# Altium PCB PCB1.PcbDoc
Units mm, origin at the board's own origin, x right, y up, seen from the top; angles counter-clockwise.
Board outline 240 x 132 mm, 2 copper layers (Top Layer, Bottom Layer); 44 components, 152 nets, 326 pads, 18 vias.
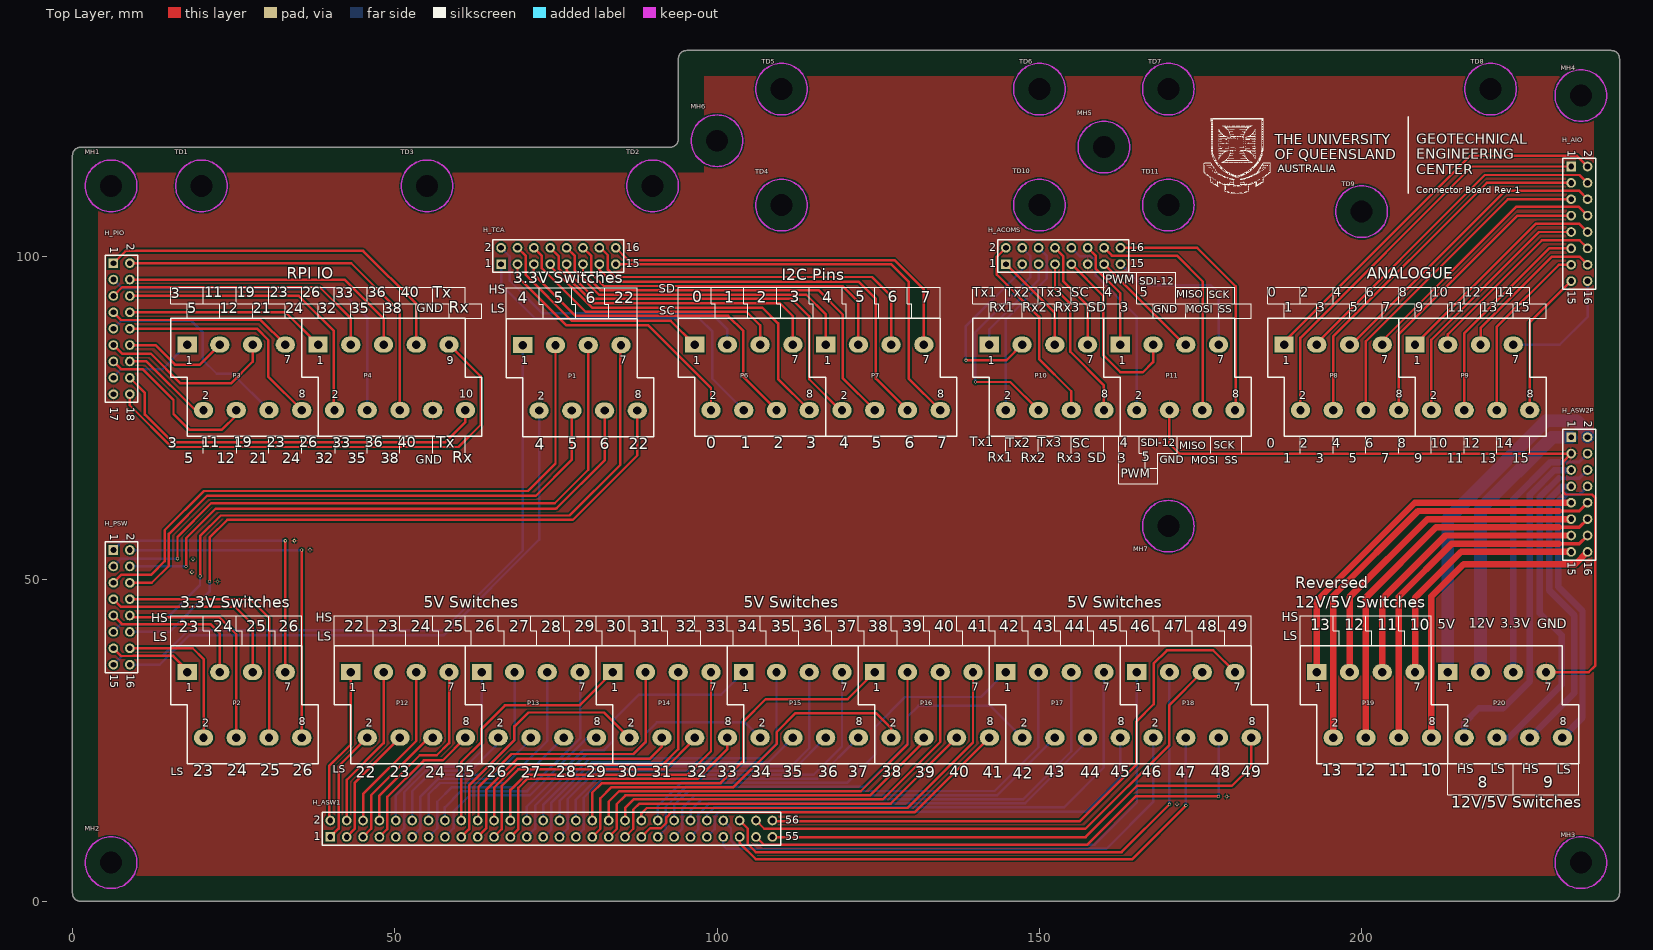
[diagram p0: Top Layer view]
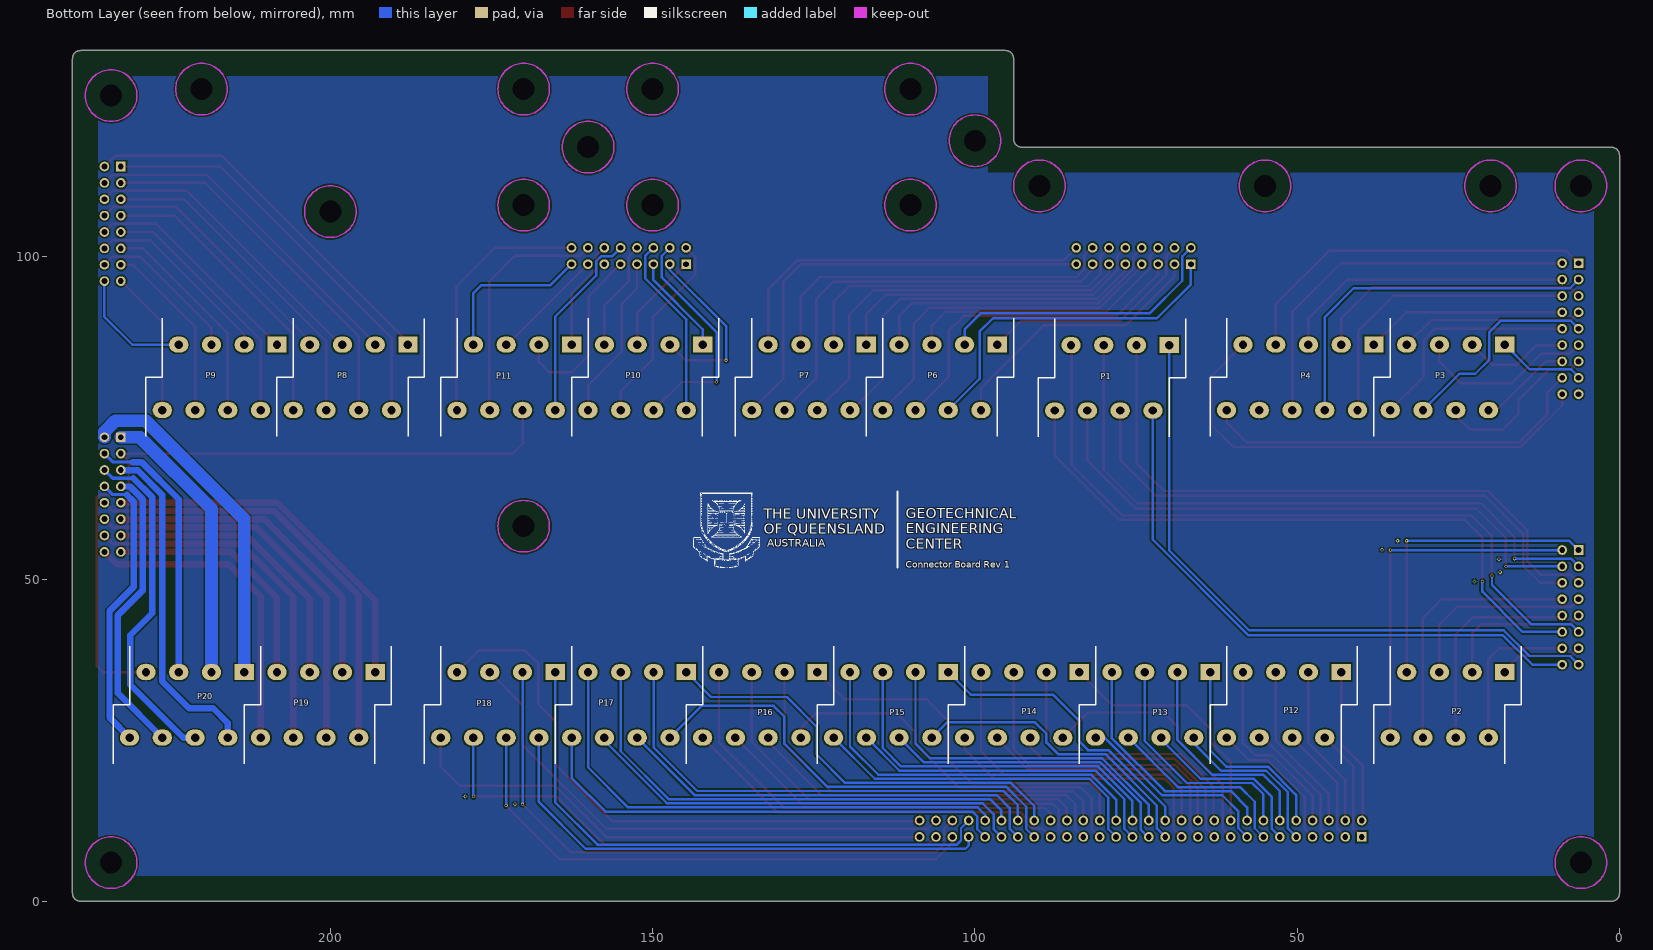
[diagram p1: Bottom Layer view, seen from below]

## Layer stack, top to bottom
Top Solder: solder mask 0.0102, Solder Resist, Dk 3.5
Top Layer: signal copper 0.0356
Dielectric 1: dielectric 0.32, FR-4, Dk 4.8
Bottom Layer: signal copper 0.0356
Bottom Solder: solder mask 0.0102, Solder Resist, Dk 3.5

## Board outline
0,1.27 0,115.73 cw(c1.27,115.73) 1.27,117 92.73,117 ccw(c92.73,118.27) 94,118.27 94,130.73 cw(c95.27,130.73) 95.27,132 238.73,132 cw(c238.73,130.73) 240,130.73 240,1.27 cw(c238.73,1.27) 238.73,0 1.27,0 cw(c1.27,1.27)

## Design rules (kind name [scope] priority, off if disabled: settings)
Clearance [All] p1: gap=0.254 ignorepadtopadclearanceinfootprint=TRUE except(0: Arc-Hole Track-Hole SMDPad-Hole THPad-Hole Via-Hole Fill-Hole Poly-Hole Region-Hole Text-Hole)
HoleSize [All] p1: absolutevalues=TRUE maxlimit=6.3 minlimit=0.3 maxpercent=80.000 minpercent=20.000
PlaneConnect [All] p1: planeconnectstyle=Relief reliefexpansion=0.508 reliefentries=4 reliefconductorwidth=0.3 reliefairgap=0.254
PolygonConnect [All] p1: connectstyle=Relief reliefconductorwidth=0.254 reliefentries=4 polygonreliefangle="90 Angle" airgapwidth=0.254
RoutingVias [All] p1: holewidth=0.3 width=0.6 viastyle="Through Hole" minholewidth=0.3 minwidth=0.5 maxholewidth=1 maxwidth=2
SolderMaskExpansion [All] p1: expansion=0.102 istentingtop=FALSE
UnConnectedPin [All] p1:
UnRoutedNet [All] p1: checkbadconnections=TRUE
Width [All] p1: maxlimit=5 minlimit=0.152 preferedwidth=0.305 minimp=50.000000 maximp=50.000000 favimp=50.000000
27 further rules are at their usual default settings.

## Classes and differential pairs
net class 5V_LS_[1..28]: 5V_LS_1 5V_LS_2 5V_LS_3 5V_LS_4 5V_LS_5 5V_LS_6 5V_LS_7 5V_LS_8 5V_LS_9 5V_LS_10 5V_LS_11 5V_LS_12 5V_LS_13 5V_LS_14 5V_LS_15 5V_LS_16 5V_LS_17 5V_LS_18 5V_LS_19 5V_LS_20 5V_LS_21 5V_LS_22 5V_LS_23 5V_LS_24 5V_LS_25 5V_LS_26 5V_LS_27 5V_LS_28
net class 5V_HS_[1..28]: 5V_HS_1 5V_HS_2 5V_HS_3 5V_HS_4 5V_HS_5 5V_HS_6 5V_HS_7 5V_HS_8 5V_HS_9 5V_HS_10 5V_HS_11 5V_HS_12 5V_HS_13 5V_HS_14 5V_HS_15 5V_HS_16 5V_HS_17 5V_HS_18 5V_HS_19 5V_HS_20 5V_HS_21 5V_HS_22 5V_HS_23 5V_HS_24 5V_HS_25 5V_HS_26 5V_HS_27 5V_HS_28
net class 5V12V_LS_[1..2]: 5V12V_LS_1 5V12V_LS_2
net class 5V12V_HS_[1..2]: 5V12V_HS_1 5V12V_HS_2
net class PI_LS_[1..8]: PI_LS_1 PI_LS_2 PI_LS_3 PI_LS_4 PI_LS_5 PI_LS_6 PI_LS_7 PI_LS_8
net class PI_HS_[1..8]: PI_HS_1 PI_HS_2 PI_HS_3 PI_HS_4 PI_HS_5 PI_HS_6 PI_HS_7 PI_HS_8
net class INV_5V12V_LS_[1..4]: INV_5V12V_LS_1 INV_5V12V_LS_2 INV_5V12V_LS_3 INV_5V12V_LS_4
net class INV_5V12V_HS_[1..4]: INV_5V12V_HS_1 INV_5V12V_HS_2 INV_5V12V_HS_3 INV_5V12V_HS_4
net class AD[0..15]: AD0 AD1 AD2 AD3 AD4 AD5 AD6 AD7 AD8 AD9 AD10 AD11 AD12 AD13 AD14 AD15

## Components (designator, comment, footprint, x,y, rotation, side; value= is the part's Value field where it differs from the comment)
H_ACOMS "Header 8X2" HDR2X8 144.8,98.85 r0 top locked
H_AIO "Header 8X2" HDR2X8 232.5,114 r270 top locked
H_ASW1 "Header 28X2" HDR2X28 40,10 r0 top
H_ASW2P "Header 8X2" HDR2X8 232.5,72 r270 top locked
H_PIO "Header 9X2" HDR2X9 6.35,99 r270 top locked
H_PSW "Header 8X2" HDR2X8 6.35,54.5 r270 top locked
H_TCA "Header 8X2" HDR2X8 66.5,98.85 r0 top locked
MH1 "MOUNTING_HOLE" M3 6,111 r0 top value=brd-brd
MH2 "MOUNTING_HOLE" M3 6,6 r0 top value=brd-brd
MH3 "MOUNTING_HOLE" M3 234,6 r0 top value=brd-brd
MH4 "MOUNTING_HOLE" M3 234,125 r0 top value=brd-brd
MH5 "MOUNTING_HOLE" M3 160,117 r0 top value=brd-brd
MH6 "MOUNTING_HOLE" M3 100,118 r0 top value=brd-brd
MH7 "MOUNTING_HOLE" M3 170,58.2 r0 top value=brd-brd
P1 "Phoenix_8pin_4X2" MKKDSN_8PIN-4POS_5.08PITCH_1.5WIRE 69.85,86.3 r0 top
P2 "Phoenix_8pin_4X2" MKKDSN_8PIN-4POS_5.08PITCH_1.5WIRE 17.78,35.56 r0 top
P3 "Phoenix_8pin_4X2" MKKDSN_8PIN-4POS_5.08PITCH_1.5WIRE 17.78,86.36 r0 top
P4 "Phoenix_10pin_5X2" MKKDSN_10PIN-5POS_5.08PITCH_1.5WIRE 38.1,86.36 r0 top
P6 "Phoenix_8pin_4X2" MKKDSN_8PIN-4POS_5.08PITCH_1.5WIRE 96.52,86.36 r0 top
P7 "Phoenix_8pin_4X2" MKKDSN_8PIN-4POS_5.08PITCH_1.5WIRE 116.84,86.36 r0 top
P8 "Phoenix_8pin_4X2" MKKDSN_8PIN-4POS_5.08PITCH_1.5WIRE 187.96,86.36 r0 top
P9 "Phoenix_8pin_4X2" MKKDSN_8PIN-4POS_5.08PITCH_1.5WIRE 208.28,86.36 r0 top
P10 "Phoenix_8pin_4X2" MKKDSN_8PIN-4POS_5.08PITCH_1.5WIRE 142.24,86.36 r0 top
P11 "Phoenix_8pin_4X2" MKKDSN_8PIN-4POS_5.08PITCH_1.5WIRE 162.56,86.36 r0 top
P12 "Phoenix_8pin_4X2" MKKDSN_8PIN-4POS_5.08PITCH_1.5WIRE 43.18,35.56 r0 top
P13 "Phoenix_8pin_4X2" MKKDSN_8PIN-4POS_5.08PITCH_1.5WIRE 63.5,35.56 r0 top
P14 "Phoenix_8pin_4X2" MKKDSN_8PIN-4POS_5.08PITCH_1.5WIRE 83.82,35.56 r0 top
P15 "Phoenix_8pin_4X2" MKKDSN_8PIN-4POS_5.08PITCH_1.5WIRE 104.14,35.56 r0 top
P16 "Phoenix_8pin_4X2" MKKDSN_8PIN-4POS_5.08PITCH_1.5WIRE 124.46,35.56 r0 top
P17 "Phoenix_8pin_4X2" MKKDSN_8PIN-4POS_5.08PITCH_1.5WIRE 144.78,35.56 r0 top
P18 "Phoenix_8pin_4X2" MKKDSN_8PIN-4POS_5.08PITCH_1.5WIRE 165.1,35.56 r0 top
P19 "Phoenix_8pin_4X2" MKKDSN_8PIN-4POS_5.08PITCH_1.5WIRE 193.04,35.56 r0 top
P20 "Phoenix_8pin_4X2" MKKDSN_8PIN-4POS_5.08PITCH_1.5WIRE 213.36,35.56 r0 top
TD1 "TIEDOWNS" M3 20,111 r0 top
TD2 "TIEDOWNS" M3 90,111 r0 top
TD3 "TIEDOWNS" M3 55,111 r0 top
TD4 "TIEDOWNS" M3 110,108 r0 top
TD5 "TIEDOWNS" M3 110,126 r0 top
TD6 "TIEDOWNS" M3 150,126 r0 top
TD7 "TIEDOWNS" M3 170,126 r0 top
TD8 "TIEDOWNS" M3 220,126 r0 top
TD9 "TIEDOWNS" M3 200,107 r0 top
TD10 "TIEDOWNS" M3 150,108 r0 top
TD11 "TIEDOWNS" M3 170,108 r0 top

## Footprints (in the part's own frame and the unit in brackets; to place one, negate y for a bottom-side part, rotate by r counter-clockwise, add the part's x,y. Pads: shape width x height; smd on the part's side, far side on the other; paste and mask are expansions set on the pad)
HDR2X8 [mm] "Connector; Header; 8x2 Position"
  rect 1.5x1.5 hole 0.9: 1(0,0)
  round 1.5 hole 0.9: 2(0,2.54) 3(2.54,0) 4(2.54,2.54) 5(5.08,0) 6(5.08,2.54) 7(7.62,0) 8(7.62,2.54) 9(10.16,0) 10(10.16,2.54) 11(12.7,0) 12(12.7,2.54) 13(15.24,0) 14(15.24,2.54) 15(17.78,0) 16(17.78,2.54)
  silkscreen extent -1.27,-1.27 19.05,3.81
HDR2X9 [mm] "Connector; Header; 9x2 Position"
  rect 1.5x1.5 hole 0.9: 1(0,0)
  round 1.5 hole 0.9: 2(0,2.54) 3(2.54,0) 4(2.54,2.54) 5(5.08,0) 6(5.08,2.54) 7(7.62,0) 8(7.62,2.54) 9(10.16,0) 10(10.16,2.54) 11(12.7,0) 12(12.7,2.54) 13(15.24,0) 14(15.24,2.54) 15(17.78,0) 16(17.78,2.54) 17(20.32,0) 18(20.32,2.54)
  silkscreen extent -1.27,-1.27 21.59,3.81
HDR2X28 [mm] "Connector; Header; 28x2 Position"
  rect 1.5x1.5 hole 0.9: 1(0,0)
  round 1.5 hole 0.9: 2(0,2.54) 3(2.54,0) 4(2.54,2.54) 5(5.08,0) 6(5.08,2.54) 7(7.62,0) 8(7.62,2.54) 9(10.16,0) 10(10.16,2.54) 11(12.7,0) 12(12.7,2.54) 13(15.24,0) 14(15.24,2.54) 15(17.78,0) 16(17.78,2.54) 17(20.32,0) 18(20.32,2.54) 19(22.86,0) 20(22.86,2.54) 21(25.4,0) 22(25.4,2.54) 23(27.94,0) 24(27.94,2.54) 25(30.48,0) 26(30.48,2.54) 27(33.02,0) 28(33.02,2.54) 29(35.56,0) 30(35.56,2.54) 31(38.1,0) 32(38.1,2.54) 33(40.64,0) 34(40.64,2.54) 35(43.18,0) 36(43.18,2.54) 37(45.72,0) 38(45.72,2.54) 39(48.26,0) 40(48.26,2.54) 41(50.8,0) 42(50.8,2.54) 43(53.34,0) 44(53.34,2.54) 45(55.88,0) 46(55.88,2.54) 47(58.42,0) 48(58.42,2.54) 49(60.96,0) 50(60.96,2.54) 51(63.5,0) 52(63.5,2.54) 53(66.04,0) 54(66.04,2.54) 55(68.58,0) 56(68.58,2.54)
  silkscreen extent -1.27,-1.27 69.85,3.81
M3 [mm] "M3 Screw Mounting Hole, 6mm Head Diameter Clearance"
  round 0 hole 3.4 unplated: 0(0,0)
  Keep-Out Layer circle w0.2: c0,0 r4
MKKDSN_8PIN-4POS_5.08PITCH_1.5WIRE [mm] "Phoenix MKKDSN 5.08mm Pitch, 4-Position, 8 Pin, 1.5mm Wire Cross"
  rect 3x2.5 hole 1.3: 1(0,0)
  oval 3x2.5 hole 1.3: 2(2.54,-10.16) 3(5.08,0) 4(7.62,-10.16) 5(10.16,0) 6(12.7,-10.16) 7(15.24,0) 8(17.78,-10.16)
  silkscreen extent -2.54,-14.21 20.32,4.09, body extent -3.11,-14.2 20.32,4.1, height 19.1
MKKDSN_10PIN-5POS_5.08PITCH_1.5WIRE [mm] "Phoenix MKKDSN 5.08mm Pitch, 5-Position, 10 Pin, 1.5mm Wire Cross"
  rect 3x2.5 hole 1.3: 1(0,0)
  oval 3x2.5 hole 1.3: 2(2.54,-10.16) 3(5.08,0) 4(7.62,-10.16) 5(10.16,0) 6(12.7,-10.16) 7(15.24,0) 8(17.78,-10.16) 9(20.32,0) 10(22.86,-10.16)
  silkscreen extent -2.54,-14.21 25.4,4.09, body extent -3.11,-14.2 25.4,4.1, height 19.1

## Part data
H_ACOMS H_AIO H_ASW2P H_PSW H_TCA: "Header, 8-Pin, Dual row", LatestRevisionDate=17-Jul-2002, LatestRevisionNote="Re-released for DXP Platform.", Publisher="Altium Limited", System=Connector
H_ASW1: "Header, 28-Pin, Dual row", LatestRevisionDate=17-Jul-2002, LatestRevisionNote="Re-released for DXP Platform.", Publisher="Altium Limited", System=Connector
H_PIO: "Header, 9-Pin, Dual row", LatestRevisionDate=17-Jul-2002, LatestRevisionNote="Re-released for DXP Platform.", Publisher="Altium Limited", System=Connector
TD1 TD2 TD3 TD4 TD5 TD6 TD7 TD8 TD9 TD10 TD11: library part MOUNTING_HOLE

## Via types
v1: diameter 0.5, hole 0.3, Top Layer to Bottom Layer, 18 vias

## Nets (pads, with @x,y where several pads share a name; then routed paths per layer and width w, separated by ;. In a path a pad name is that pad's centre, name@x,y a point inside that pad or via, vN(x,y) a via of type N, cw(c..) or ccw(c..) an arc to the next point about the centre after c; other vN are vias at no path point)
3.3V: H_ASW2P.4 P20.5 | length 41.3
  Bottom Layer w0.5: 230.69,68.15 230.75,68.18 233.76,68.18 H_ASW2P.4
  Bottom Layer w1: P20.5 223.52,62.38 229.29,68.15 230.69,68.15
5V: H_ASW2P.2 P20.1 | length 53.3
  Bottom Layer w2: P20.1 213.36,59.29 228.62,74.55 233.35,74.55 235.04,72.86 H_ASW2P.2
5V12V_HS_1: H_ASW2P.5 P20.2 | length 52.1
  Bottom Layer w1: P20.2 215.9,27.68 218.18,29.96 221.92,29.96 226.1,34.14 226.1,63.1 229.896,66.896 232.476,66.896 H_ASW2P.5
5V12V_HS_2: H_ASW2P.7 P20.6 | length 45.8
  Bottom Layer w1: P20.6 233.006,32.346 233.006,44.344 229.13,48.22 229.13,62.413 231.071,64.354 232.109,64.354 232.292,64.172 H_ASW2P.7
5V12V_LS_1: H_ASW2P.6 P20.4 | length 53.1
  Bottom Layer w0.5: 230.56,65.64 233.76,65.64 H_ASW2P.6
  Bottom Layer w1: P20.4 222.83,25.4 231.03,33.6 231.03,41.3 227.64,44.69 227.64,62.72 230.56,65.64
5V12V_LS_2: H_ASW2P.8 P20.8 | length 45
  Bottom Layer w0.5: 231.59,63.1 233.76,63.1 H_ASW2P.8
  Bottom Layer w1: P20.8 234.26,28.52 234.26,45.04 230.52,48.78 230.52,62.03 231.59,63.1
5V_HS_1: H_ASW1.2 P12.1 | length 24.5
  Top Layer w0.381: H_ASW1.2 39.85,12.69 39.85,21.05 43.18,24.38 P12.1
5V_HS_2: H_ASW1.4 P12.3 | length 25.4
  Top Layer w0.381: H_ASW1.4 42.54,18.84 48.26,24.56 P12.3
5V_HS_3: H_ASW1.6 P12.5 | length 26.4
  Top Layer w0.381: H_ASW1.6 45.08,16.65 53.34,24.91 P12.5
5V_HS_4: H_ASW1.8 P12.7 | length 29
  Top Layer w0.381: H_ASW1.8 47.62,16.397 53.883,22.66 56.52,22.66 58.42,24.56 P12.7
5V_HS_5: H_ASW1.10 P13.1 | length 32.3
  Bottom Layer w0.381: H_ASW1.10 50.16,16.52 54.54,20.9 61.01,20.9 63.5,23.39 P13.1
5V_HS_6: H_ASW1.12 P13.3 | length 34.2
  Bottom Layer w0.381: H_ASW1.12 52.7,17.08 55.25,19.63 63.18,19.63 68.58,25.03 P13.3
5V_HS_7: H_ASW1.14 P13.5 | length 36.6
  Bottom Layer w0.381: H_ASW1.14 55.24,16.612 56.988,18.36 67.13,18.36 73.66,24.89 P13.5
5V_HS_8: H_ASW1.16 P13.7 | length 37.7
  Bottom Layer w0.381: H_ASW1.16 57.78,14.58 60.29,17.09 70.536,17.09 78.74,25.294 P13.7
5V_HS_9: H_ASW1.18 P14.1 | length 39.5
  Top Layer w0.381: H_ASW1.18 60.32,21.62 63.43,24.73 63.43,26.76 67.08,30.41 78.67,30.41 P14.1
5V_HS_10: H_ASW1.20 P14.3 | length 44.9
  Top Layer w0.381: H_ASW1.20 62.99,12.67 62.99,17.74 68.11,22.86 87.03,22.86 88.9,24.73 P14.3
5V_HS_11: H_ASW1.22 P14.5 | length 48.1
  Top Layer w0.381: H_ASW1.22 H_ASW1.22 65.399,17.631 68.918,21.15 91.51,21.15 93.98,23.62 P14.5
5V_HS_12: H_ASW1.24 P14.7 | length 50.6
  Top Layer w0.381: H_ASW1.24 67.94,17.3 70.26,19.62 95.4,19.62 99.06,23.28 P14.7
5V_HS_13: H_ASW1.26 P15.1 | length 46.3
  Bottom Layer w0.381: H_ASW1.26 70.48,14.69 79.26,23.47 82.47,23.47 83.8,24.8 83.8,27.98 87.89,32.07 100.65,32.07 P15.1
5V_HS_14: H_ASW1.28 P15.3 | length 53.6
  Bottom Layer w0.381: H_ASW1.28 73.02,14.94 80.28,22.2 106.95,22.2 109.22,24.47 P15.3
5V_HS_15: H_ASW1.30 P15.5 | length 57
  Bottom Layer w0.381: H_ASW1.30 75.56,15.59 80.9,20.93 111.44,20.93 114.3,23.79 P15.5
5V_HS_16: H_ASW1.32 P15.7 | length 59.5
  Bottom Layer w0.381: H_ASW1.32 78.1,15.78 81.98,19.66 115,19.66 119.38,24.04 P15.7
5V_HS_17: H_ASW1.34 P16.1 | length 59.4
  Top Layer w0.381: H_ASW1.34 80.64,16.87 82.12,18.35 100.56,18.35 104.08,21.87 104.08,27.9 107.53,31.35 120.25,31.35 P16.1
5V_HS_18: H_ASW1.36 P16.3 | length 64.2
  Top Layer w0.381: H_ASW1.36 83.18,15.45 84.81,17.08 122.28,17.08 129.54,24.34 P16.3
5V_HS_19: H_ASW1.38 P16.5 | length 65.9
  Top Layer w0.381: H_ASW1.38 85.72,14.49 87.04,15.81 125.7,15.81 134.62,24.73 P16.5
5V_HS_20: H_ASW1.40 P16.7 | length 68
  Top Layer w0.381: H_ASW1.40 88.26,13.65 89.09,14.48 129.52,14.48 139.7,24.66 P16.7
5V_HS_21: H_ASW1.42 P17.1 | length 67.3
  Bottom Layer w0.381: H_ASW1.42 90.8,14.77 94.42,18.39 120.14,18.39 124.57,22.82 124.57,27.09 129.18,31.7 140.92,31.7 P17.1
5V_HS_22: H_ASW1.44 P17.3 | length 74.3
  Bottom Layer w0.381: H_ASW1.44 93.34,14.9 95.56,17.12 143.08,17.12 149.86,23.9 P17.3
5V_HS_23: H_ASW1.46 P17.5 | length 76.7
  Bottom Layer w0.381: H_ASW1.46 95.88,14.08 97.65,15.85 147.51,15.85 154.94,23.28 P17.5
5V_HS_24: H_ASW1.48 P17.7 | length 80.3
  Bottom Layer w0.381: H_ASW1.48 98.42,13.43 99.57,14.58 153.79,14.58 160.02,20.81 P17.7
5V_HS_25: H_ASW1.50 P18.1 | length 89.7
  Bottom Layer w0.381: H_ASW1.50 102.159,11.341 102.159,9.431 102.785,8.805 158.555,8.805 165.1,15.35 P18.1
5V_HS_26: H_ASW1.52 P18.3 | length 93.7
  Top Layer w0.381: H_ASW1.52 104.76,11.28 104.76,8.88 105.99,7.65 162.76,7.65 v1@170.17,15.06
  Bottom Layer w0.381: v1(170.18,15.05) P18.3
5V_HS_27: H_ASW1.54 P18.5 | length 83.4
  Top Layer w0.381: H_ASW1.54 107.32,11.26 157.14,11.26 170.16,24.28 170.16,30.46 P18.5
5V_HS_28: H_ASW1.56 P18.7 | length 91.8
  Top Layer w0.381: H_ASW1.56 108.66,12.46 156.3,12.46 165.05,21.21 165.05,27.9 167.73,30.58 167.73,36.87 169.79,38.93 176.97,38.93 P18.7
5V_LS_1: H_ASW1.1 P12.2 | length 17.8
  Top Layer w0.381: H_ASW1.1 41.275,11.275 41.275,20.955 P12.2
5V_LS_2: H_ASW1.3 P12.4 | length 18.8
  Top Layer w0.381: H_ASW1.3 43.815,11.275 43.815,18.415 P12.4
5V_LS_3: H_ASW1.5 P12.6 | length 20.2
  Top Layer w0.381: H_ASW1.5 46.355,11.275 46.355,16.475 55.28,25.4 P12.6
5V_LS_4: H_ASW1.7 P12.8 | length 22.6
  Top Layer w0.381: H_ASW1.7 48.83,11.21 48.83,16.2 54.51,21.88 57.44,21.88 P12.8
5V_LS_5: H_ASW1.9 P13.2 | length 26.1
  Bottom Layer w0.381: H_ASW1.9 51.46,11.3 51.46,16.922 54.803,20.265 61.795,20.265 66.04,24.51 P13.2
5V_LS_6: H_ASW1.11 P13.4 | length 27.9
  Bottom Layer w0.381: H_ASW1.11 53.93,11.23 53.93,16.2 56.725,18.995 64.965,18.995 71.12,25.15 P13.4
5V_LS_7: H_ASW1.13 P13.6 | length 29.7
  Bottom Layer w0.381: H_ASW1.13 56.586,11.345 56.586,15.456 58.855,17.725 68.525,17.725 P13.6
5V_LS_8: H_ASW1.15 P13.8 | length 31.4
  Bottom Layer w0.381: H_ASW1.15 59.126,11.345 59.126,13.956 61.625,16.455 70.965,16.455 79.91,25.4 P13.8
5V_LS_9: H_ASW1.17 P14.2 | length 40.9
  Top Layer w0.381: H_ASW1.17 61.52,11.2 61.52,17.98 68.56,25.02 68.56,27.13 70.73,29.3 82.46,29.3 P14.2
5V_LS_10: H_ASW1.19 P14.4 | length 39.3
  Top Layer w0.381: H_ASW1.19 64.16,11.3 64.16,17.29 68.97,22.1 89.49,22.1 91.44,24.05 P14.4
5V_LS_11: H_ASW1.21 P14.6 | length 41.6
  Top Layer w0.381: H_ASW1.21 66.6,11.2 66.6,17.9 69.16,20.46 91.8,20.46 96.52,25.18 P14.6
5V_LS_12: H_ASW1.23 P14.8 | length 44.8
  Top Layer w0.381: H_ASW1.23 69.17,11.23 69.17,17.632 70.523,18.985 96.975,18.985 101.6,23.61 P14.8
5V_LS_13: H_ASW1.25 P15.2 | length 47.4
  Bottom Layer w0.381: H_ASW1.25 71.76,11.28 71.76,14.84 79.755,22.835 87.105,22.835 88.9,24.63 88.9,26 90.65,27.75 104.33,27.75 P15.2
5V_LS_14: H_ASW1.27 P15.4 | length 47.6
  Bottom Layer w0.381: H_ASW1.27 73.18,10 74.3,11.12 74.3,15.322 80.543,21.565 107.925,21.565 P15.4
5V_LS_15: H_ASW1.29 P15.6 | length 50.3
  Bottom Layer w0.381: H_ASW1.29 76.84,11.28 76.84,15.854 81.281,20.295 111.735,20.295 P15.6
5V_LS_16: H_ASW1.31 P15.8 | length 53.1
  Bottom Layer w0.381: H_ASW1.31 79.31,11.21 79.31,16.092 82.243,19.025 115.545,19.025 P15.8
5V_LS_17: H_ASW1.33 P16.2 | length 60.6
  Top Layer w0.381: H_ASW1.33 81.91,11.27 81.91,15.99 83.635,17.715 102.545,17.715 109.25,24.42 109.25,26.27 112.19,29.21 124.68,29.21 127,26.89 P16.2
5V_LS_18: H_ASW1.35 P16.4 | length 57.9
  Top Layer w0.381: H_ASW1.35 84.43,11.25 84.43,15.1 85.775,16.445 123.735,16.445 132.08,24.79 P16.4
5V_LS_19: H_ASW1.37 P16.6 | length 59.5
  Top Layer w0.381: H_ASW1.37 86.99,11.27 86.99,14.22 87.945,15.175 126.935,15.175 P16.6
5V_LS_20: H_ASW1.39 P16.8 | length 60.9
  Top Layer w0.381: H_ASW1.39 89.606,11.345 91.295,11.345 92.146,12.196 92.146,13.035 92.956,13.845 130.685,13.845 P16.8
5V_LS_21: H_ASW1.41 P17.2 | length 71.5
  Bottom Layer w0.381: H_ASW1.41 92.03,11.23 92.03,14.67 95.115,17.755 122.855,17.755 129.58,24.48 129.58,28.68 131.22,30.32 142.4,30.32 P17.2
5V_LS_22: H_ASW1.43 P17.4 | length 67.3
  Bottom Layer w0.381: H_ASW1.43 94.63,11.29 94.63,14.5 96.615,16.485 143.485,16.485 P17.4
5V_LS_23: H_ASW1.45 P17.6 | length 69.6
  Bottom Layer w0.381: H_ASW1.45 97.11,11.23 97.11,13.52 98.805,15.215 147.773,15.215 157.48,24.922 P17.6
5V_LS_24: H_ASW1.47 P17.8 | length 75.3
  Bottom Layer w0.381: H_ASW1.47 99.64,11.22 99.64,13.17 100.39,13.92 157.33,13.92 162.56,19.15 P17.8
5V_LS_25: H_ASW1.49 P18.2 | length 81.2
  Bottom Layer w0.381: H_ASW1.49 100.96,8.682 101.488,8.153 160.383,8.153 167.64,15.41 P18.2
5V_LS_26: H_ASW1.51 P18.4 | length 85.2
  Top Layer w0.381: H_ASW1.51 103.5,9.05 105.99,6.56 164.44,6.56 v1@172.725,14.845
  Bottom Layer w0.381: v1(172.72,14.85) P18.4
5V_LS_27: H_ASW1.53 P18.6 | length 84.5
  Top Layer w0.381: H_ASW1.53 107.235,8.805 157.465,8.805 164.93,16.27 v1(177.8,16.27)
  Bottom Layer w0.381: v1(177.8,16.27) P18.6
5V_LS_28: H_ASW1.55 P18.8 | length 83.3
  Top Layer w0.381: H_ASW1.55 108.64,9.94 108.66,9.96 157.18,9.96 165.15,17.93 179.88,17.93 182.88,20.93 P18.8
12V: H_ASW2P.1 P20.3 | length 44
  Bottom Layer w2: P20.3 218.44,60.89 229.55,72 H_ASW2P.1
A_RX1: H_ACOMS.6 P10.2 | length 28.4
  Bottom Layer w0.381: P10.2 144.78,90.29 151.16,96.67 151.16,100.11 H_ACOMS.6
A_RX2: H_ACOMS.4 P10.4 | length 36.4
  Top Layer w0.381: v1(140.08,80.57) 145.49,80.57 P10.4
  Bottom Layer w0.381: v1(140.08,80.57) 140.08,88.3 148.57,96.79 148.57,100.16 H_ACOMS.4
A_RX3: H_ACOMS.2 P10.6 | length 30.6
  Top Layer w0.381: H_ACOMS.2 143.38,99.97 143.38,97.23 149.95,90.66 149.95,84.12 154.94,79.13 P10.6
A_TX1: H_ACOMS.5 P10.1 | length 15.7
  Bottom Layer w0.381: P10.1 142.24,88.76 149.88,96.4 H_ACOMS.5
A_TX2: H_ACOMS.3 P10.3 | length 28.3
  Top Layer w0.381: v1(138.61,83.94) 144.9,83.94 P10.3 P10.3@147.34,86.38
  Bottom Layer w0.381: v1(138.61,83.94) 138.61,89.24 147.34,97.97 H_ACOMS.3
A_TX3: H_ACOMS.1 P10.5 | length 15.6
  Top Layer w0.381: H_ACOMS.1 152.4,91.25 P10.5
AD0: H_AIO.2 P8.1 | length 60.2
  Top Layer w0.381: P8.1 188.04,86.44 188.04,86.85 216.89,115.7 233.34,115.7 H_AIO.2
AD1: H_AIO.1 P8.2 | length 64.2
  Top Layer w0.381: P8.2 190.49,76.21 190.49,87.42 217.07,114 H_AIO.1
AD2: H_AIO.4 P8.3 | length 53.6
  Top Layer w0.381: P8.3 193.04,86.62 219.1,112.68 233.82,112.68 H_AIO.4
AD3: H_AIO.3 P8.4 | length 58.2
  Top Layer w0.381: P8.4 195.58,87.63 219.41,111.46 H_AIO.3
AD4: H_AIO.6 P8.5 | length 47.4
  Top Layer w0.381: P8.5 198.4,86.36 222.29,110.25 233.71,110.25 H_AIO.6
AD5: H_AIO.5 P8.6 | length 51.7
  Top Layer w0.381: P8.6 200.66,86.89 222.69,108.92 H_AIO.5
AD6: H_AIO.8 P8.7 | length 41.6
  Top Layer w0.381: P8.7 203.2,86.96 223.966,107.726 233.695,107.726 H_AIO.8
AD7: H_AIO.7 P8.8 | length 46.1
  Top Layer w0.381: P8.8 205.74,87.92 224.2,106.38 H_AIO.7
AD8: H_AIO.10 P9.1 | length 35.1
  Top Layer w0.381: P9.1 227.07,105.15 233.73,105.15 H_AIO.10
AD9: H_AIO.9 P9.2 | length 39.5
  Top Layer w0.381: P9.2 210.82,87.13 227.53,103.84 H_AIO.9
AD10: H_AIO.12 P9.3 | length 29.9
  Top Layer w0.381: P9.3 213.36,87.95 227.97,102.56 233.82,102.56 235.04,101.34 H_AIO.12
AD11: H_AIO.11 P9.4 | length 34
  Top Layer w0.381: P9.4 215.9,88.12 229.08,101.3 H_AIO.11
AD12: H_AIO.14 P9.5 | length 24.3
  Top Layer w0.381: P9.5 218.44,88.97 229.46,99.99 233.87,99.99 235.04,98.82 H_AIO.14
AD13: H_AIO.13 P9.6 | length 28.5
  Top Layer w0.381: P9.6 220.98,89.15 230.59,98.76 H_AIO.13
AD14: H_AIO.16 P9.7 | length 18.9
  Bottom Layer w0.381: P9.7 230.73,86.36 235.04,90.67 H_AIO.16
AD15: H_AIO.15 P9.8 | length 22.7
  Top Layer w0.381: P9.8 226.06,89.78 H_AIO.15
ard_scl_21: H_ACOMS.8 P10.7 | length 17.1
  Top Layer w0.381: H_ACOMS.8 153.69,100.12 153.69,96.21 157.48,92.42 P10.7
ard_sda_20: H_ACOMS.7 P10.8 | length 25.8
  Top Layer w0.381: H_ACOMS.7 152.42,95.06 154.81,92.67 154.81,85.26 160.02,80.05 P10.8
GND: H_ACOMS.11 H_ASW2P.3 H_PIO.17 P4.8 P11.4 P20.7 | length 114
  Top Layer w0.381: P11.4 170.18,70.984 171.704,69.46 H_ASW2P.3 231.292,68.252 231.292,63.475 231.648,63.119 235.712,63.119 236.245,62.586 236.245,36.576 235.229,35.56 P20.7
  other v1: 171.36,15.08 179.06,16.26 22.49,49.62 18.52,51.07 18.7,53.08 36.86,54.53 34.42,55.94
INV_5V12V_HS_1: H_ASW2P.15 P19.7 | length 38.7
  Top Layer w1: P19.7 208.28,47.08 215.42,54.22 H_ASW2P.15
INV_5V12V_HS_2: H_ASW2P.13 P19.5 | length 44.8
  Top Layer w1: P19.5 203.22,35.58 203.22,46.97 213.01,56.76 H_ASW2P.13
INV_5V12V_HS_3: H_ASW2P.11 P19.3 | length 51
  Top Layer w1: P19.3 198.12,47.21 210.21,59.3 H_ASW2P.11
INV_5V12V_HS_4: H_ASW2P.9 P19.1 | length 56.8
  Top Layer w1: P19.1 193.04,46.65 208.23,61.84 H_ASW2P.9
INV_5V12V_LS_1: H_ASW2P.16 P19.8 | length 49
  Top Layer w1: P19.8 210.82,47.31 215.81,52.3 233.12,52.3 H_ASW2P.16
INV_5V12V_LS_2: H_ASW2P.14 P19.6 | length 55.1
  Top Layer w0.5: 230.56,55.5 230.56,55.48 233.76,55.48 H_ASW2P.14
  Top Layer w1: P19.6 205.74,47.24 214,55.5 230.56,55.5
INV_5V12V_LS_3: H_ASW2P.12 P19.4 | length 61.2
  Top Layer w0.5: 230.56,58.02 233.76,58.02 H_ASW2P.12
  Top Layer w1: P19.4 200.66,47.15 211.53,58.02 230.56,58.02
INV_5V12V_LS_4: H_ASW2P.10 P19.2 | length 67.4
  Top Layer w0.5: 230.56,60.56 233.76,60.56 H_ASW2P.10
  Top Layer w1: P19.2 195.58,47.39 208.75,60.56 230.56,60.56
MISO: H_ACOMS.13 P11.5 | length 17.9
  Top Layer w0.381: H_ACOMS.13 172.53,86.36 P11.5
MOSI: H_ACOMS.14 P11.6 | length 37.5
  Top Layer w0.381: H_ACOMS.14 161.25,100.18 171.32,100.18 175.34,96.16 175.34,76.28 P11.6
PI_3: H_PIO.15 P3.1 | length 13.6
  Bottom Layer w0.381: H_PIO.15 6.35,81.37 7.52,82.54 13.96,82.54 P3.1
PI_5: H_PIO.14 P3.2 | length 14.6
  Top Layer w0.381: H_PIO.14 11.48,83.76 19.04,76.2 P3.2
PI_11: H_PIO.12 P3.3 | length 16.5
  Top Layer w0.381: H_PIO.12 12.85,86.3 15.89,83.26 19.76,83.26 P3.3
PI_12: H_PIO.13 P3.4 | length 26.5
  Top Layer w0.381: H_PIO.13 7.58,82.53 10.93,82.53 15.67,77.79 15.67,75.6 18.14,73.13 23.13,73.13 25.4,75.4 P3.4
PI_19: H_PIO.11 P3.5 | length 28.1
  Top Layer w0.381: H_PIO.11 7.68,84.97 12.14,84.97 16.76,80.35 24.57,80.35 27.94,83.72 P3.5
PI_21: H_PIO.9 P3.6 | length 32.9
  Bottom Layer w0.381: H_PIO.9 7.61,90.1 18.4,90.1 20.2,88.3 20.2,84.03 22.38,81.85 24.83,81.85 P3.6
PI_23: H_PIO.7 P3.7 | length 28.7
  Top Layer w0.381: H_PIO.7 7.545,90.185 29.195,90.185 P3.7
PI_24: H_PIO.10 P3.8 | length 35.2
  Top Layer w0.381: H_PIO.10 28.61,88.84 30.4,87.05 30.4,81.36 P3.8
PI_26: H_PIO.8 P4.1 | length 31.3
  Top Layer w0.381: H_PIO.8 33.08,91.38 P4.1
PI_32: H_PIO.6 P4.2 | length 46.2
  Top Layer w0.381: H_PIO.6 35.11,93.92 40.55,88.48 40.55,76.29 P4.2
PI_33: H_PIO.5 P4.3 | length 43.5
  Top Layer w0.381: H_PIO.5 7.695,95.265 38.365,95.265 43.18,90.45 P4.3
PI_35: H_PIO.3 P4.4 | length 56.2
  Bottom Layer w0.381: H_PIO.3 7.695,95.115 41.245,95.115 45.72,90.64 P4.4
PI_36: H_PIO.4 P4.5 | length 45.9
  Top Layer w0.381: H_PIO.4 42.21,96.46 48.26,90.41 P4.5
PI_38: H_PIO.2 P4.6 | length 60.3
  Top Layer w0.381: H_PIO.2 43.24,99 50.8,91.44 P4.6
PI_40: H_PIO.1 P4.7 | length 57.5
  Top Layer w0.381: H_PIO.1 8.27,100.92 45.08,100.92 53.34,92.66 P4.7
PI_HS_1: H_PSW.1 P2.7 | length 47.7
  Top Layer w0.381: P2.7 v1(33.02,55.94)
  Bottom Layer w0.381: H_PSW.1 7.81,55.96 v1@33.02,55.96
PI_HS_2: H_PSW.3 P1.5 | length 101.2
  Top Layer w0.381: v1(16.29,53.16) 16.29,56.54 21.51,61.76 74.82,61.76 80.01,66.95 P1.5
  Bottom Layer w0.381: H_PSW.3 7.55,53.16 v1(16.29,53.16)
PI_HS_3: H_PSW.5 P1.3 | length 97.5
  Top Layer w0.381: H_PSW.5 7.63,50.7 12.24,50.7 14.315,52.775 14.315,57.595 20.38,63.66 70.69,63.66 74.93,67.9 P1.3
PI_HS_4: H_PSW.7 P2.5 | length 30.9
  Top Layer w0.381: H_PSW.7 7.545,45.686 9.385,45.686 9.409,45.71 25.22,45.71 27.94,42.99 P2.5
  Bottom Layer w0.381: H_PSW.7 H_PSW.7@6.58,46.88
PI_HS_5: H_PSW.9 P2.3 | length 23.7
  Top Layer w0.381: H_PSW.9 7.67,43.02 21.42,43.02 22.86,41.58 P2.3
PI_HS_6: H_PSW.11 P1.7 | length 112.4
  Top Layer w0.381: v1@19.79,50.47 19.79,56.65 23,59.86 77.13,59.86 85,67.73 85,86.21 P1.7
  Bottom Layer w0.381: H_PSW.11 7.55,43 13.72,43 19.78,49.06 v1(19.78,50.47)
PI_HS_7: H_PSW.13 P2.1 | length 13.2
  Top Layer w0.381: H_PSW.13 7.545,38.066 9.385,38.066 9.389,38.07 15.61,38.07 17.78,35.9 P2.1
PI_HS_8: H_PSW.15 P1.1 | length 102.7
  Bottom Layer w0.381: H_PSW.15 7.695,38.066 13.987,38.066 17.982,42.06 57.462,42.06 69.85,54.448 P1.1
PI_LS_1: H_PSW.2 P2.8 | length 55.8
  Top Layer w0.381: P2.8 v1(35.56,54.49)
  Bottom Layer w0.381: H_PSW.2 v1(35.56,54.49)
PI_LS_2: H_PSW.4 P1.6 | length 90.8
  Top Layer w0.381: v1(17.62,51.96) 17.62,56.33 22.192,60.902 75.002,60.902 75.097,60.997 75.136,60.997 82.55,68.411 P1.6
  Bottom Layer w0.381: H_PSW.4 v1(17.62,51.96)
PI_LS_3: H_PSW.6 P1.4 | length 87
  Top Layer w0.381: H_PSW.6 12.3,49.42 14.95,52.07 14.95,57 20.88,62.93 71.88,62.93 77.47,68.52 P1.4
PI_LS_4: H_PSW.8 P2.6 | length 41.4
  Top Layer w0.381: H_PSW.8 27.58,46.88 30.55,43.91 30.55,25.47 P2.6
PI_LS_5: H_PSW.10 P2.4 | length 33.7
  Top Layer w0.381: H_PSW.10 9.13,44.1 22.73,44.1 25.4,41.43 P2.4
PI_LS_6: H_PSW.12 P1.8 | length 102
  Top Layer w0.381: v1(21.26,49.63) 21.26,56.43 24.03,59.2 77.62,59.2 87.63,69.21 P1.8
  Bottom Layer w0.381: H_PSW.12 15.03,41.8 21.28,48.05 21.28,49.61 v1(21.26,49.63)
PI_LS_7: H_PSW.14 P2.2 | length 24.3
  Top Layer w0.381: H_PSW.14 18.66,39.26 20.35,37.57 20.35,25.43 P2.2
PI_LS_8: H_PSW.16 P1.2 | length 91.6
  Bottom Layer w0.381: H_PSW.16 13.54,36.72 18.13,41.31 57.61,41.31 72.39,56.09 P1.2
PI_RX: H_PIO.16 P4.10 | length 61.3
  Top Layer w0.381: H_PIO.16 11.23,78.88 11.23,75.518 15.498,71.25 57.85,71.25 60.96,74.36 P4.10
PI_TX: H_PIO.18 P4.9 | length 74.7
  Top Layer w0.381: H_PIO.18 8.89,76.96 15.363,70.487 59.877,70.487 63.33,73.94 63.33,81.45 P4.9
PWM1: H_ACOMS.12 P11.1 | length 17.1
  Top Layer w0.381: H_ACOMS.12 158.78,100.11 158.78,98.12 162.56,94.34 P11.1
PWM2: H_ACOMS.10 P11.2 | length 30.4
  Bottom Layer w0.381: H_ACOMS.10 156.24,100.11 157.929,100.11 158.74,99.299 158.74,97.07 165.1,90.71 P11.2
SCK: H_ACOMS.15 P11.7 | length 25.1
  Bottom Layer w0.381: H_ACOMS.15 165.84,95.59 176.56,95.59 177.8,94.35 P11.7
SS: H_ACOMS.16 P11.8 | length 39.6
  Top Layer w0.381: H_ACOMS.16 174.48,101.39 180.44,95.43 180.44,76.3 P11.8
SSDI-12: H_ACOMS.9 P11.3 | length 28.3
  Top Layer w0.381: H_ACOMS.9 159.9,93.91 159.9,84.75 162.57,82.08 166.06,82.08 167.64,83.66 P11.3
tca_sc0: H_TCA.3 P6.2 | length 42.5
  Top Layer w0.381: H_TCA.3 69.04,96.91 76.56,89.39 89.29,89.39 99.06,79.62 P6.2
tca_sc1: H_TCA.1 P6.4 | length 53.1
  Bottom Layer w0.381: H_TCA.1 66.5,95.715 71.755,90.46 97.19,90.46 99.27,88.38 99.27,81.07 P6.4
tca_sc2: H_TCA.5 P6.6 | length 52.1
  Top Layer w0.381: H_TCA.5 71.58,97.27 78.03,90.82 101.71,90.82 104.07,88.46 104.07,81.35 P6.6
tca_sc3: H_TCA.7 P6.8 | length 54.8
  Top Layer w0.381: H_TCA.7 74.12,98.592 80.612,92.1 107.01,92.1 109.46,89.65 109.46,81.04 P6.8
tca_sc4: H_TCA.9 P7.2 | length 58.6
  Top Layer w0.381: H_TCA.9 76.66,97.89 81.1,93.45 111.59,93.45 114.3,90.74 114.3,80.99 119.235,76.055 119.28,76.01 119.38,76.01 P7.2
tca_sc5: H_TCA.11 P7.4 | length 61.2
  Top Layer w0.381: H_TCA.11 79.2,97.52 81.9,94.82 115.72,94.82 119.53,91.01 119.53,81.13 P7.4
tca_sc6: H_TCA.13 P7.6 | length 64.9
  Top Layer w0.381: H_TCA.13 81.74,97.99 83.62,96.11 122.01,96.11 124.65,93.47 124.65,81.09 P7.6
tca_sc7: H_TCA.15 P7.8 | length 68.5
  Top Layer w0.381: H_TCA.15 127,98.85 129.76,96.09 129.76,81.06 P7.8
tca_sd0: H_TCA.4 P6.1 | length 35.4
  Top Layer w0.381: H_TCA.4 70.33,100.1 70.33,97.19 77.44,90.08 92.8,90.08 P6.1
tca_sd1: H_TCA.2 P6.3 | length 44.9
  Bottom Layer w0.381: H_TCA.2 67.84,100.05 67.84,96.27 72.9,91.21 99.13,91.21 101.6,88.74 P6.3
tca_sd2: H_TCA.6 P6.5 | length 44.2
  Top Layer w0.381: H_TCA.6 72.83,100.14 72.83,98.22 79.59,91.46 104.59,91.46 106.68,89.37 P6.5
tca_sd3: H_TCA.8 P6.7 | length 47.6
  Top Layer w0.381: H_TCA.8 75.41,100.1 75.41,98.2 80.8,92.81 109.72,92.81 111.76,90.77 P6.7
tca_sd4: H_TCA.10 P7.1 | length 50.5
  Top Layer w0.381: H_TCA.10 77.94,100.11 77.94,97.87 81.7,94.11 113.83,94.11 116.84,91.1 P7.1
tca_sd5: H_TCA.12 P7.3 | length 54.4
  Top Layer w0.381: H_TCA.12@79.21,101.4 80.5,100.11 80.5,97.37 82.41,95.46 119.43,95.46 121.92,92.97 P7.3
tca_sd6: H_TCA.14 P7.5 | length 57.2
  Top Layer w0.381: H_TCA.14 81.91,101.39 83.06,100.24 83.06,98 84.2,96.86 124.03,96.86 127,93.89 P7.5
tca_sd7: H_TCA.16 P7.7 | length 59
  Top Layer w0.381: H_TCA.16 86.185,99.485 127.495,99.485 132.08,94.9 P7.7
pads on no net: MH1.0 MH2.0 MH3.0 MH4.0 MH5.0 MH6.0 MH7.0 TD1.0 TD2.0 TD3.0 TD4.0 TD5.0 TD6.0 TD7.0 TD8.0 TD9.0 TD10.0 TD11.0

## Polygon pours and split planes (outlines as drawn)
GND on Top Layer "Top Layer-GND" (solid, remove dead copper, pour order 0): 4,4 4,113 98,113 98,128 236,128 236,4
GND on Bottom Layer "Bottom Layer-GND" (solid, remove dead copper, pour order 2): 4,4 4,113 98,113 98,128 236,128 236,4

## Silkscreen, mask and mechanical layers (free items; w line width, h text height)
Top Overlay:
  drawing of 372 lines, arcs and shapes, not listed
  text "THE UNIVERSITY  / OF QUEENSLAND" at 186.48,115.11 h1.56
  text "AUSTRALIA" at 186.964,113.074 h1.17
  text "GEOTECHNICAL / ENGINEERING / CENTER" at 208.476,112.829 h1.56 r359.91
  text "Connector Board Rev 1" at 208.476,109.883 h1
  text "RPI IO" at 33.27,96 h3
  text "ANALOGUE" at 200.79,95.97 h3
  text "I2C Pins" at 110,95.74 h3
  text "PWM" at 160.19,95.37 h2.3
  text "3.3V Switches" at 68.36,95.28 h3
  text "SDI-12" at 165.49,95.28 h2
  text "SD" at 90.95,93.94 h2.2
  text "HS" at 64.607,93.8 h2.3
  text "5" at 165.58,93.278 h2.5
  text "Tx1" at 139.7,93.218 h2.5
  text "Tx2" at 144.78,93.218 h2.5
  text "Tx3" at 149.88,93.218 h2.5
  text "SC" at 154.96,93.218 h2.5
  text "4" at 160.04,93.218 h2.5
  text "MISO" at 171.27,93.22 h2
  text "0" at 185.42,93.218 h2.5
  text "2" at 190.5,93.218 h2.5
  text "4" at 195.58,93.218 h2.5
  text "6" at 200.66,93.218 h2.5
  text "8" at 205.74,93.218 h2.5
  text "10" at 210.82,93.218 h2.5
  text "12" at 215.9,93.218 h2.5
  text "14" at 220.98,93.218 h2.5
  text "SCK" at 176.28,93.18 h2
  text "11" at 20.44,93.14 h2.8
  text "19" at 25.52,93.14 h2.8
  text "23" at 30.6,93.14 h2.8
  text "26" at 35.68,93.14 h2.8
  text "36" at 45.84,93.14 h2.8
  text "40" at 50.92,93.14 h2.8
  text "33" at 40.76,93.08 h2.8
  text "3" at 15.24,93.04 h2.8
  text "Tx" at 55.92,92.99 h3
  text "0" at 96.18,92.3 h3
  text "3" at 111.24,92.3 h3
  text "5" at 121.4,92.3 h3
  text "6" at 126.48,92.3 h3
  text "1" at 101.08,92.267 h3
  text "2" at 106.16,92.267 h3
  text "4" at 116.32,92.267 h3
  text "7" at 131.56,92.267 h3
  text "5" at 74.67,92.17 h3
  text "4" at 69.04,92.14 h3
  text "6" at 79.62,92.15 h3
  text "22" at 84.07,92.15 h3
  text "Rx1" at 142.24,90.932 h2.5
  text "Rx2" at 147.34,90.932 h2.5
  text "Rx3" at 152.4,90.932 h2.5
  text "SD" at 157.5,90.932 h2.5
  text "3" at 162.56,90.932 h2.5
  text "GND" at 167.64,90.932 h2
  text "MOSI" at 172.72,90.932 h2
  text "SS" at 177.8,90.932 h2
  text "1" at 187.96,90.932 h2.5
  text "3" at 193.04,90.932 h2.5
  text "5" at 198.12,90.932 h2.5
  text "7" at 203.2,90.932 h2.5
  text "9" at 208.28,90.932 h2.5
  text "11" at 213.36,90.932 h2.5
  text "13" at 218.44,90.932 h2.5
  text "15" at 223.52,90.932 h2.5
  text "GND" at 53.39,90.89 h2.2
  text "LS" at 64.89,90.86 h2.3
  text "5" at 17.78,90.69 h2.8
  text "12" at 22.86,90.69 h2.8
  text "21" at 27.94,90.69 h2.8
  text "24" at 33.02,90.69 h2.8
  text "32" at 38.1,90.69 h2.8
  text "35" at 43.18,90.69 h2.8
  text "38" at 48.26,90.69 h2.8
  text "Rx" at 58.4,90.67 h3
  text "SC" at 91.03,90.54 h2.2
  text "SDI-12" at 165.76,70.22 h2
  text "Tx1" at 139.2,70.08 h2.5
  text "Tx3" at 149.71,69.96 h2.5
  text "4" at 162.48,69.92 h2.5
  text "11" at 19.97,69.89 h2.8
  text "19" at 25.05,69.89 h2.8
  text "23" at 30.13,69.89 h2.8
  text "26" at 35.21,69.89 h2.8
  text "36" at 45.37,69.89 h2.8
  text "40" at 50.45,69.89 h2.8
  text "Tx2" at 144.85,69.9 h2.5
  text "33" at 40.29,69.83 h2.8
  text "SC" at 155.12,69.83 h2.5
  text "3" at 14.77,69.79 h2.8
  text "SCK" at 177.04,69.81 h2
  text "0" at 185.29,69.798 h2.5
  text "2" at 190.37,69.798 h2.5
  text "4" at 195.45,69.798 h2.5
  text "6" at 200.53,69.798 h2.5
  text "8" at 205.61,69.798 h2.5
  text "10" at 210.69,69.798 h2.5
  text "12" at 215.77,69.798 h2.5
  text "14" at 220.85,69.798 h2.5
  text "Tx" at 56.44,69.77 h3
  text "MISO" at 171.72,69.74 h2
  text "0" at 98.298,69.694 h3
  text "3" at 113.866,69.694 h3
  text "5" at 124.026,69.694 h3
  text "6" at 129.106,69.694 h3
  text "1" at 103.706,69.661 h3
  text "2" at 108.786,69.661 h3
  text "4" at 118.946,69.661 h3
  text "7" at 134.186,69.661 h3
  text "5" at 76.86,69.51 h3
  text "6" at 81.81,69.49 h3
  text "22" at 86.26,69.49 h3
  text "4" at 71.71,69.47 h3
  text "5" at 165.88,67.7 h2.5
  text "Rx1" at 141.99,67.62 h2.5
  text "Rx3" at 152.66,67.61 h2.5
  text "Rx2" at 147.12,67.6 h2.5
  text "SD" at 157.51,67.54 h2.5
  text "GND" at 168.68,67.55 h2
  text "MOSI" at 173.56,67.51 h2
  text "SS" at 178.73,67.51 h2
  text "1" at 187.83,67.512 h2.5
  text "3" at 192.91,67.512 h2.5
  text "5" at 197.99,67.512 h2.5
  text "7" at 203.07,67.512 h2.5
  text "9" at 208.15,67.512 h2.5
  text "11" at 213.23,67.512 h2.5
  text "13" at 218.31,67.512 h2.5
  text "15" at 223.39,67.512 h2.5
  text "3" at 162.15,67.49 h2.5
  text "Rx" at 58.92,67.45 h3
  text "5" at 17.31,67.44 h2.8
  text "12" at 22.39,67.44 h2.8
  text "21" at 27.47,67.44 h2.8
  text "24" at 32.55,67.44 h2.8
  text "32" at 37.63,67.44 h2.8
  text "35" at 42.71,67.44 h2.8
  text "38" at 47.79,67.44 h2.8
  text "GND" at 53.28,67.4 h2.2
  text "PWM" at 162.63,65.23 h2.3
  text "Reversed / 12V/5V Switches" at 189.68,44.94 h3
  text "3.3V Switches" at 16.72,44.89 h3
  text "5V Switches" at 54.505,44.89 h3
  text "5V Switches" at 104.14,44.89 h3
  text "5V Switches" at 154.339,44.89 h3
  text "HS" at 37.727,42.94 h2.3
  text "HS" at 187.577,42.95 h2.3
  text "HS" at 12.227,42.86 h2.3
  text "3.3V" at 221.49,41.89 h2.5
  text "12V" at 216.63,41.87 h2.5
  text "GND" at 227.25,41.86 h2.5
  text "5V" at 211.8,41.78 h2.5
  text "13" at 192.014,41.462 h3
  text "12" at 197.275,41.462 h3
  text "11" at 202.438,41.462 h3
  text "10" at 207.474,41.462 h3
  text "36" at 113.32,41.26 h3
  text "44" at 153.94,41.22 h3
  text "49" at 179.23,41.23 h3
  text "24" at 21.844,41.208 h3
  text "25" at 26.924,41.208 h3
  text "26" at 32.004,41.208 h3
  text "22" at 42.164,41.208 h3
  text "23" at 47.425,41.208 h3
  text "25" at 57.624,41.208 h3
  text "26" at 62.484,41.208 h3
  text "27" at 67.745,41.208 h3
  text "29" at 77.944,41.208 h3
  text "30" at 82.804,41.208 h3
  text "31" at 88.065,41.208 h3
  text "32" at 93.565,41.208 h3
  text "33" at 98.264,41.208 h3
  text "34" at 103.124,41.208 h3
  text "35" at 108.385,41.208 h3
  text "37" at 118.584,41.208 h3
  text "38" at 123.444,41.208 h3
  text "39" at 128.705,41.208 h3
  text "40" at 133.71,41.2 h3
  text "41" at 138.904,41.208 h3
  text "42" at 143.764,41.208 h3
  text "43" at 149.025,41.208 h3
  text "45" at 159.224,41.208 h3
  text "46" at 164.084,41.208 h3
  text "47" at 169.345,41.208 h3
  text "48" at 174.48,41.19 h3
  text "24" at 52.48,41.18 h3
  text "23" at 16.51,41.148 h3
  text "28" at 72.74,41.13 h3
  text "LS" at 38.01,40 h2.3
  text "LS" at 187.86,40.01 h2.3
  text "LS" at 12.51,39.92 h2.3
  text "LS" at 40.386,19.558 h2
  text "HS" at 214.79,19.42 h2.3
  text "LS" at 220.06,19.37 h2.3
  text "HS" at 224.92,19.37 h2.3
  text "LS" at 230.26,19.35 h2.3
  text "LS" at 15.24,19.16 h2
  text "24" at 24.034,18.842 h3
  text "25" at 29.114,18.842 h3
  text "26" at 34.194,18.842 h3
  text "13" at 193.792,18.856 h3
  text "12" at 199.053,18.856 h3
  text "11" at 204.216,18.856 h3
  text "10" at 209.252,18.856 h3
  text "23" at 18.7,18.782 h3
  text "34" at 105.32,18.61 h3
  text "23" at 49.203,18.602 h3
  text "25" at 59.402,18.602 h3
  text "26" at 64.262,18.602 h3
  text "28" at 75.023,18.602 h3
  text "29" at 79.722,18.602 h3
  text "30" at 84.582,18.602 h3
  text "31" at 89.843,18.602 h3
  text "32" at 95.343,18.602 h3
  text "33" at 100.042,18.602 h3
  text "35" at 110.163,18.602 h3
  text "36" at 115.663,18.602 h3
  text "37" at 120.362,18.602 h3
  text "38" at 125.55,18.6 h3
  text "40" at 135.983,18.602 h3
  text "43" at 150.803,18.602 h3
  text "45" at 161.002,18.602 h3
  text "46" at 165.862,18.602 h3
  text "48" at 176.623,18.602 h3
  text "49" at 181.322,18.602 h3
  text "22" at 43.942,18.569 h3
  text "24" at 54.703,18.569 h3
  text "27" at 69.523,18.569 h3
  text "41" at 141.24,18.57 h3
  text "44" at 156.303,18.569 h3
  text "47" at 171.123,18.569 h3
  text "39" at 130.76,18.54 h3
  text "42" at 145.9,18.43 h3
  text "8" at 217.99,17.03 h3
  text "9" at 228.13,17.01 h3
  text "12V/5V Switches" at 213.87,13.91 h3
Bottom Overlay:
  drawing of 82 lines, arcs and shapes, not listed
  text "P10" at 154.2,80.877 h1.52
  text "P6" at 107.29,80.837 h1.52
  text "P8" at 198.96,80.847 h1.52
  text "P3" at 28.55,80.817 h1.52
  text "P7" at 127.22,80.82 h1.52
  text "P9" at 219.3,80.817 h1.52
  text "P11" at 174.22,80.78 h1.52
  text "P4" at 49.42,80.73 h1.52
  text "P1" at 80.51,80.69 h1.52
  text "THE UNIVERSITY  / OF QUEENSLAND" at 132.73,57.011 h1.56
  text "AUSTRALIA" at 132.247,54.975 h1.17
  text "GEOTECHNICAL / ENGINEERING / CENTER" at 110.734,54.73 h1.56 r0.09
  text "Connector Board Rev 1" at 110.734,51.784 h1
  text "P20" at 220.65,31.057 h1.52
  text "P17" at 158.36,30.05 h1.52
  text "P19" at 205.7,30.047 h1.52
  text "P18" at 177.25,29.947 h1.52
  text "P12" at 52.09,28.84 h1.52
  text "P2" at 26.02,28.75 h1.52
  text "P14" at 92.7,28.69 h1.52
  text "P15" at 113.18,28.597 h1.52
  text "P16" at 133.68,28.597 h1.52
  text "P13" at 72.39,28.547 h1.52
Mechanical 1:
  lines w0.254: 0,1.27 ccw(c1.27,1.27) 1.27,0 238.73,0 ccw(c238.73,1.27) 240,1.27 240,130.73 ccw(c238.73,130.73) 238.73,132 95.27,132 ccw(c95.27,130.73) 94,130.73 94,118.27 cw(c92.73,118.27) 92.73,117 1.27,117 ccw(c1.27,115.73) 0,115.73 0,1.27
Drill Drawing:
  circle w0.254: c3.157,156.572 r0.847
  lines w0.254: 0,1.27 ccw(c1.27,1.27) 1.27,0 238.73,0 ccw(c238.73,1.27) 240,1.27 240,130.73 ccw(c238.73,130.73) 238.73,132 95.27,132 ccw(c95.27,130.73) 94,130.73 94,118.27 cw(c92.73,118.27) 92.73,117 1.27,117 ccw(c1.27,115.73) 0,115.73 0,1.27 ; 2.311,151.916 4.004,151.916 4.004,153.609 2.311,153.609 2.311,151.916 ; 2.311,159.536 3.157,159.959 4.004,159.536 3.581,160.382 4.004,161.229 3.157,160.806 2.311,161.229 2.734,160.382 2.311,159.536 ; 2.311,163.769 2.734,163.769 3.157,163.346 3.581,163.769 4.004,163.769 3.581,164.192 4.004,164.616 3.581,164.616 3.157,165.039 2.734,164.616 2.311,164.616 2.734,164.192 2.311,163.769
  lines w0.381: 0.792,150.773 275.645,150.773 ; 0.792,166.013 275.645,166.013 ; 14.784,146.963 14.784,169.823 ; 30.02,146.963 30.02,169.823 ; 59.222,146.963 59.222,169.823 ; 72.071,146.963 72.071,169.823 ; 90.709,146.963 90.709,169.823 ; 128.798,146.963 128.798,169.823 ; 143.78,146.963 143.78,169.823 ; 162.723,146.963 162.723,169.823 ; 185.069,146.963 185.069,169.823 ; 206.755,146.963 206.755,169.823 ; 240.628,146.963 240.628,169.823 ; 0.792,146.963 275.645,146.963 275.645,169.823 0.792,169.823 0.792,146.963
  text "Symbol" at 3.078,167.156 h1.83
  text "Count" at 15.927,167.156 h1.83
  text "Hole Size" at 31.163,167.156 h1.83
  text "Plated" at 60.365,167.156 h1.83
  text "Hole Type" at 73.214,167.156 h1.83
  text "Drill Layer Pair" at 91.852,167.156 h1.83
  text "Via/Pad" at 129.941,167.156 h1.83
  text "Pad Shape" at 144.923,167.156 h1.83
  text "Template" at 163.866,167.156 h1.83
  text "Description" at 186.212,167.156 h1.83
  text "Hole Tolerance (+)" at 207.898,167.156 h1.83
  text "Hole Tolerance (-)" at 241.771,167.156 h1.83
  text "18" at 15.927,163.346 h1.52
  text "0.300mm (11.81mil)" at 31.163,163.346 h1.52
  text "PTH" at 60.365,163.346 h1.52
  text "Round" at 73.214,163.346 h1.52
  text "Top Layer - Bottom Layer" at 91.852,163.346 h1.52
  text "Via" at 129.941,163.346 h1.52
  text "Rounded" at 144.923,163.346 h1.52
  text "v50h30" at 163.866,163.346 h1.52
  text "18" at 15.927,159.536 h1.52
  text "3.400mm (133.86mil)" at 31.163,159.536 h1.52
  text "NPTH" at 60.365,159.536 h1.52
  text "Round" at 73.214,159.536 h1.52
  text "Top Layer - Bottom Layer" at 91.852,159.536 h1.52
  text "Pad" at 129.941,159.536 h1.52
  text "Rounded" at 144.923,159.536 h1.52
  text "c0hn340(Tol18)" at 163.866,159.536 h1.52
  text "0.180mm (7.09mil)" at 207.898,159.536 h1.52
  text "154" at 15.927,155.726 h1.52
  text "0.900mm (35.43mil)" at 31.163,155.726 h1.52
  text "PTH" at 60.365,155.726 h1.52
  text "Round" at 73.214,155.726 h1.52
  text "Top Layer - Bottom Layer" at 91.852,155.726 h1.52
  text "Pad" at 129.941,155.726 h1.52
  text "(Mixed)" at 144.923,155.726 h1.52
  text "(Mixed)" at 163.866,155.726 h1.52
  text "154" at 15.927,151.916 h1.52
  text "1.300mm (51.18mil)" at 31.163,151.916 h1.52
  text "PTH" at 60.365,151.916 h1.52
  text "Round" at 73.214,151.916 h1.52
  text "Top Layer - Bottom Layer" at 91.852,151.916 h1.52
  text "Pad" at 129.941,151.916 h1.52
  text "(Mixed)" at 144.923,151.916 h1.52
  text "(Mixed)" at 163.866,151.916 h1.52
  text "344 Total" at 15.927,148.106 h1.52

## Dimensions
238.73,130.73 to 244.35,133.87 on Drill Drawing
92.73,118.27 to 91.1,118.58 on Drill Drawing
94,118.27 to 0,115.73 on Drill Drawing
238.73,132 to 238.73,0 on Drill Drawing
1.27,117 to 1.27,0 on Drill Drawing
240,1.27 to 0,1.27 on Drill Drawing

## Text inside footprints (layer, text, board x,y; h text height)
H_ACOMS: Top Overlay "2" at 142.26,100.882 h1.27; Top Overlay "1" at 142.26,98.342 h1.27; Top Overlay "15" at 164.104,98.342 h1.27; Top Overlay "16" at 164.104,100.882 h1.27
H_AIO: Top Overlay "2" at 234.532,116.54 h1.27 r270; Top Overlay "1" at 231.992,116.54 h1.27 r270; Top Overlay "15" at 231.992,94.696 h1.27 r270; Top Overlay "16" at 234.532,94.696 h1.27 r270
H_ASW1: Top Overlay "2" at 37.46,12.032 h1.27; Top Overlay "1" at 37.46,9.492 h1.27; Top Overlay "55" at 110.612,9.492 h1.27; Top Overlay "56" at 110.612,12.032 h1.27
H_ASW2P: Top Overlay "2" at 234.532,74.54 h1.27 r270; Top Overlay "1" at 231.992,74.54 h1.27 r270; Top Overlay "15" at 231.992,52.696 h1.27 r270; Top Overlay "16" at 234.532,52.696 h1.27 r270
H_PIO: Top Overlay "18" at 8.382,76.648 h1.27 r270; Top Overlay "17" at 5.842,76.648 h1.27 r270; Top Overlay "1" at 5.842,101.54 h1.27 r270; Top Overlay "2" at 8.382,102.048 h1.27 r270
H_PSW: Top Overlay "16" at 8.382,35.196 h1.27 r270; Top Overlay "15" at 5.842,35.196 h1.27 r270; Top Overlay "1" at 5.842,57.04 h1.27 r270; Top Overlay "2" at 8.382,57.04 h1.27 r270
H_TCA: Top Overlay "2" at 63.96,100.882 h1.27; Top Overlay "1" at 63.96,98.342 h1.27; Top Overlay "15" at 85.804,98.342 h1.27; Top Overlay "16" at 85.804,100.882 h1.27
P1: Top Overlay "1" at 69.63,83.3 h1.27; Top Overlay "2" at 72.18,77.82 h1.27; Top Overlay "8" at 87.2,78.04 h1.27; Top Overlay "7" at 84.92,83.38 h1.27
P2: Top Overlay "1" at 17.56,32.56 h1.27; Top Overlay "2" at 20.11,27.08 h1.27; Top Overlay "8" at 35.13,27.3 h1.27; Top Overlay "7" at 32.85,32.64 h1.27
P3: Top Overlay "1" at 17.56,83.36 h1.27; Top Overlay "2" at 20.11,77.88 h1.27; Top Overlay "8" at 35.13,78.1 h1.27; Top Overlay "7" at 32.85,83.44 h1.27
P4: Top Overlay "1" at 37.88,83.36 h1.27; Top Overlay "2" at 40.22,78.03 h1.27; Top Overlay "10" at 60.02,78.1 h1.27; Top Overlay "9" at 58.06,83.33 h1.27
P6: Top Overlay "1" at 96.3,83.36 h1.27; Top Overlay "2" at 98.85,77.88 h1.27; Top Overlay "8" at 113.87,78.1 h1.27; Top Overlay "7" at 111.59,83.44 h1.27
P7: Top Overlay "1" at 116.62,83.36 h1.27; Top Overlay "2" at 119.17,77.88 h1.27; Top Overlay "8" at 134.19,78.1 h1.27; Top Overlay "7" at 131.91,83.44 h1.27
P8: Top Overlay "1" at 187.74,83.36 h1.27; Top Overlay "2" at 190.29,77.88 h1.27; Top Overlay "8" at 205.31,78.1 h1.27; Top Overlay "7" at 203.03,83.44 h1.27
P9: Top Overlay "1" at 208.06,83.36 h1.27; Top Overlay "2" at 210.61,77.88 h1.27; Top Overlay "8" at 225.63,78.1 h1.27; Top Overlay "7" at 223.35,83.44 h1.27
P10: Top Overlay "1" at 142.02,83.36 h1.27; Top Overlay "2" at 144.57,77.88 h1.27; Top Overlay "8" at 159.59,78.1 h1.27; Top Overlay "7" at 157.31,83.44 h1.27
P11: Top Overlay "1" at 162.34,83.36 h1.27; Top Overlay "2" at 164.89,77.88 h1.27; Top Overlay "8" at 179.91,78.1 h1.27; Top Overlay "7" at 177.63,83.44 h1.27
P12: Top Overlay "1" at 42.96,32.56 h1.27; Top Overlay "2" at 45.51,27.08 h1.27; Top Overlay "8" at 60.53,27.3 h1.27; Top Overlay "7" at 58.25,32.64 h1.27
P13: Top Overlay "1" at 63.28,32.56 h1.27; Top Overlay "2" at 65.83,27.08 h1.27; Top Overlay "8" at 80.85,27.3 h1.27; Top Overlay "7" at 78.57,32.64 h1.27
P14: Top Overlay "1" at 83.6,32.56 h1.27; Top Overlay "2" at 86.15,27.08 h1.27; Top Overlay "8" at 101.17,27.3 h1.27; Top Overlay "7" at 98.89,32.64 h1.27
P15: Top Overlay "1" at 103.92,32.56 h1.27; Top Overlay "2" at 106.47,27.08 h1.27; Top Overlay "8" at 121.49,27.3 h1.27; Top Overlay "7" at 119.21,32.64 h1.27
P16: Top Overlay "1" at 124.24,32.56 h1.27; Top Overlay "2" at 126.79,27.08 h1.27; Top Overlay "8" at 141.81,27.3 h1.27; Top Overlay "7" at 139.53,32.64 h1.27
P17: Top Overlay "1" at 144.56,32.56 h1.27; Top Overlay "2" at 147.11,27.08 h1.27; Top Overlay "8" at 162.13,27.3 h1.27; Top Overlay "7" at 159.85,32.64 h1.27
P18: Top Overlay "1" at 164.88,32.56 h1.27; Top Overlay "2" at 167.43,27.08 h1.27; Top Overlay "8" at 182.45,27.3 h1.27; Top Overlay "7" at 180.17,32.64 h1.27
P19: Top Overlay "1" at 192.82,32.56 h1.27; Top Overlay "2" at 195.37,27.08 h1.27; Top Overlay "8" at 210.39,27.3 h1.27; Top Overlay "7" at 208.11,32.64 h1.27
P20: Top Overlay "1" at 213.14,32.56 h1.27; Top Overlay "2" at 215.69,27.08 h1.27; Top Overlay "8" at 230.71,27.3 h1.27; Top Overlay "7" at 228.43,32.64 h1.27